# EAGLE board ChestStrapV3Panel (EAGLE 5.07), part 1 of 3
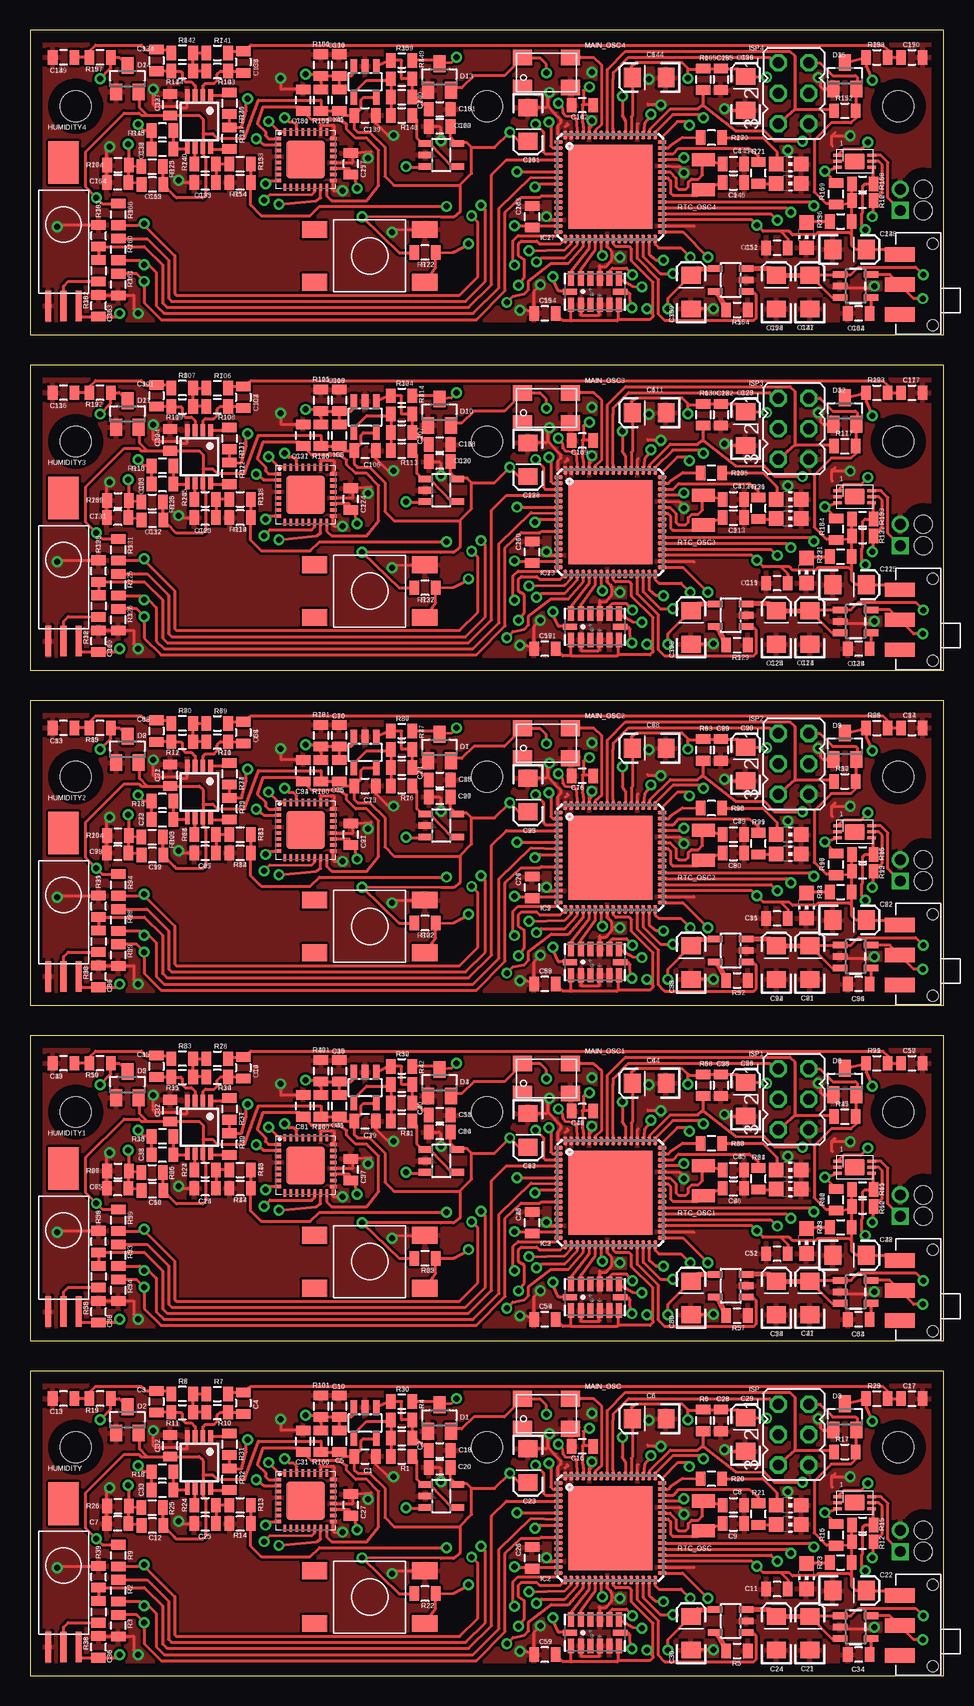
[diagram p0: board, top side]
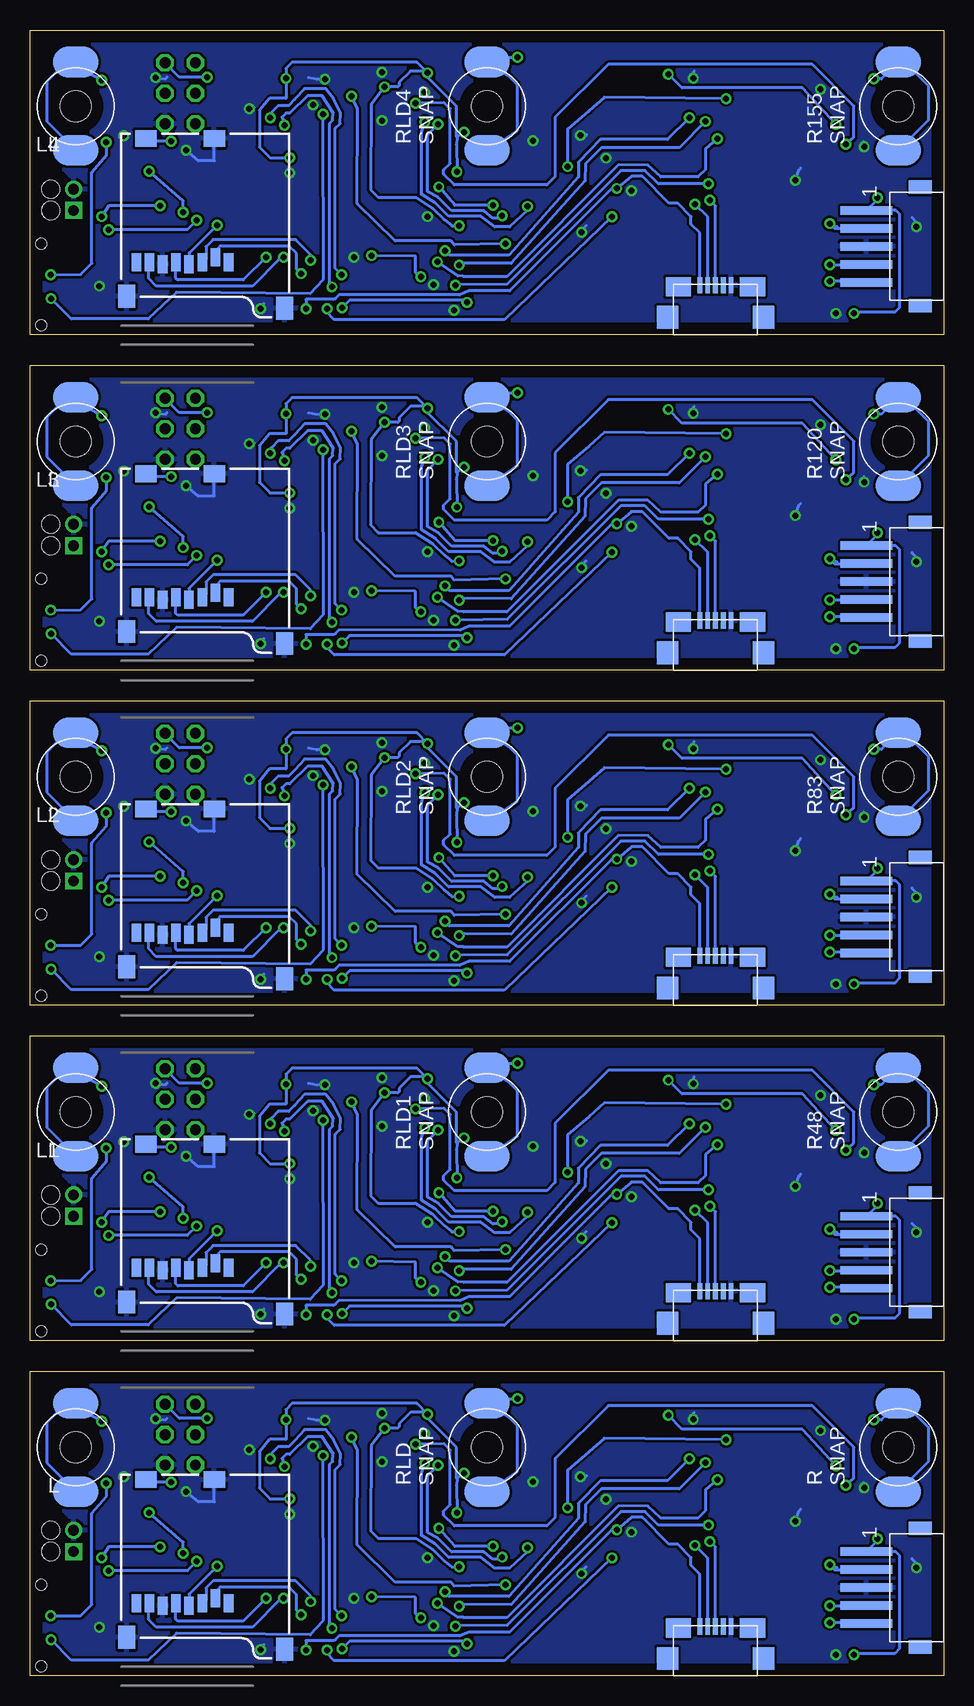
[diagram p1: board, bottom side, seen from below]

Size 76.2 x 137.16 mm. Coordinates in mm from the lower left corner, seen from the top.
Outline: 0,0 76.2,0 76.2,25.4 0,25.4 0,0
Outline: 0,27.94 76.2,27.94 76.2,53.34 0,53.34 0,27.94
Outline: 0,55.88 76.2,55.88 76.2,81.28 0,81.28 0,55.88
Outline: 0,83.82 76.2,83.82 76.2,109.22 0,109.22 0,83.82
Outline: 0,111.76 76.2,111.76 76.2,137.16 0,137.16 0,111.76
Copper layers (1*16): Top 0.035mm / dielectric 1.5mm / Bottom 0.035mm
Design rules "default *": minimum track width 10mil, minimum drill 10mil, track to track 8mil, track to pad 5mil, pad to pad 5mil, via to via 8mil, smd to smd 8mil, copper to edge 40mil, drill to drill 8mil, minimum pad ring 10mil, minimum via ring 8mil, stop-mask expansion 4mil, vias tented up to drill 0mil, thermal gap 10mil

## Footprints (pad centres in the part's own frame; a part is rotated, then mirrored left to right if it is on the bottom)
LGA14 = smd 0.5 x 1.2: 1 2,1.1; 2 1.2,1.1; 3 0.4,1.1; 4 -0.4,1.1; 5 -1.2,1.1; 6 -2,1.1; 8 -2,-1.1; 9 -1.2,-1.1; 10 -0.4,-1.1; 11 0.4,-1.1; 12 1.2,-1.1; 13 2,-1.1 | smd 1.2 x 0.5: 7 -2.1,0; 14 2.1,0
0805 = smd 0.8 x 1.2: 1 -0.9,0; 2 0.9,0
EIA3216 = smd 1.4 x 1.6: A 1.4,0; C -1.4,0
SOT23-5 = smd 0.55 x 1.2: 1 -0.95,-1.3; 2 0,-1.3; 3 0.95,-1.3; 4 0.95,1.3; 5 -0.95,1.3
SOT23 = smd 1 x 1.4: 1 -0.95,-1.1; 2 0.95,-1.1; 3 0,1.1
HIH-5030 = smd 0.508 x 2.54: -V -1.27,-5.334; OUT 0,-5.334; V+ 1.27,-5.334 | smd 2.54 x 3.556: NC 0,6.604
DGK_S-PDSO-G8 = smd 0.4 x 1: 1 -0.975,-2.2; 2 -0.325,-2.2; 3 0.325,-2.2; 4 0.975,-2.2; 5 0.975,2.2; 6 0.325,2.2; 7 -0.325,2.2; 8 -0.975,2.2
MLF64 = smd 0.7 x 0.3: 1 -4.325,3.75; 2 -4.325,3.25; 3 -4.325,2.75; 4 -4.325,2.25; 5 -4.325,1.75; 6 -4.325,1.25; 7 -4.325,0.75; 8 -4.325,0.25; 9 -4.325,-0.25; 10 -4.325,-0.75; 11 -4.325,-1.25; 12 -4.325,-1.75; 13 -4.325,-2.25; 14 -4.325,-2.75; 15 -4.325,-3.25; 16 -4.325,-3.75; 33 4.325,-3.75; 34 4.325,-3.25; 35 4.325,-2.75; 36 4.325,-2.25; 37 4.325,-1.75; 38 4.325,-1.25; 39 4.325,-0.75; 40 4.325,-0.25; 41 4.325,0.25; 42 4.325,0.75; 43 4.325,1.25; 44 4.325,1.75; 45 4.325,2.25; 46 4.325,2.75; 47 4.325,3.25; 48 4.325,3.75 | smd 0.3 x 0.7: 17 -3.75,-4.325; 18 -3.25,-4.325; 19 -2.75,-4.325; 20 -2.25,-4.325; 21 -1.75,-4.325; 22 -1.25,-4.325; 23 -0.75,-4.325; 24 -0.25,-4.325; 25 0.25,-4.325; 26 0.75,-4.325; 27 1.25,-4.325; 28 1.75,-4.325; 29 2.25,-4.325; 30 2.75,-4.325; 31 3.25,-4.325; 32 3.75,-4.325; 49 3.75,4.325; 50 3.25,4.325; 51 2.75,4.325; 52 2.25,4.325; 53 1.75,4.325; 54 1.25,4.325; 55 0.75,4.325; 56 0.25,4.325; 57 -0.25,4.325; 58 -0.75,4.325; 59 -1.25,4.325; 60 -1.75,4.325; 61 -2.25,4.325; 62 -2.75,4.325; 63 -3.25,4.325; 64 -3.75,4.325 | smd 7 x 7: TH 0,0
JP3Q = drill 0.914 octagon: 1 -2.54,-1.27; 2 -2.54,1.27; 3 0,-1.27; 4 0,1.27; 5 2.54,-1.27; 6 2.54,1.27
SNAP = smd 2.54 x 3.81: 1 -3.683,0; 2 3.683,0 | hole 2.54: 0,0
CHIP-LED0805 = smd 1.2 x 1.2: A 0,-1.05; C 0,1.05
4-SMD = smd 1.6 x 1.3: 1 -2,-1.25; 2 2,-1.25; 3 2,1.25; 4 -2,1.25
2-SMD = smd 1.092 x 1.905: P$1 -1.245,0; P$2 1.245,0
MICRO-SD-SOCKET-PP = smd 0.8 x 1.5: 1 -8.94,10.7; 2 -7.84,10.3; 3 -6.74,10.7; 4 -5.64,10.9; 5 -4.54,10.7; 6 -3.44,10.9; 7 -2.34,10.7; 8 -1.24,10.7 | smd 1.8 x 1.4: CD1 -2.05,0.4; CD2 -7.75,0.4 | smd 1.4 x 1.9: GND1 -13.6,14.55; GND3 -0.45,13.55
5-HEADER_JST_SM = smd 0.7 x 4.3: 1 -3,-2.15; 2 -1.5,-2.15; 3 0,-2.15; 4 1.5,-2.15; 5 3,-2.15 | smd 1.1 x 1.9: P$6 4.95,2.35; P$7 -4.95,2.35
6-LEAD_DFN = smd 0.7 x 0.25: 1 -1.425,0.5; 2 -1.425,0; 3 -1.425,-0.5; 4 1.425,-0.5; 5 1.425,0; 6 1.425,0.5 | smd 1.65 x 1.35: HS 0,0
SMDBUTTON = smd 2.1 x 1.4: 1 -1.6,5.2; 2 7.6,5.2; 3 -1.6,0.8; 4 7.6,0.8
2-HEADER_W/SR = drill 0.9 square: 1 0,-0.889 | drill 0.9 round: 2 0,0.889 | hole 1.5: 1.905,0.889; 1.905,-0.889
RA_J7_SM_SWTICH = smd 1.2 x 2.5: 1 -2.5,0; 2 0,0; 3 2.5,0 | hole 0.9: 3.4,-2.75; -3.4,-2.75
MICROB_USB_SM = smd 0.4 x 1.35: 1 -1.3,4.125; 2 -0.65,4.125; 3 0,4.125; 4 0.65,4.125; 5 1.3,4.125 | smd 1.8 x 1.9: P$1 -4,1.45; P$2 4,1.45 | smd 2.1 x 1.6: P$3 -3.1,4; P$4 3.1,4
QFN32 = smd 0.6 x 0.3: 1 -2.3,1.75; 2 -2.3,1.25; 3 -2.3,0.75; 4 -2.3,0.25; 5 -2.3,-0.25; 6 -2.3,-0.75; 7 -2.3,-1.25; 8 -2.3,-1.75; 17 2.3,-1.75; 18 2.3,-1.25; 19 2.3,-0.75; 20 2.3,-0.25; 21 2.3,0.25; 22 2.3,0.75; 23 2.3,1.25; 24 2.3,1.75 | smd 0.3 x 0.6: 9 -1.75,-2.3; 10 -1.25,-2.3; 11 -0.75,-2.3; 12 -0.25,-2.3; 13 0.25,-2.3; 14 0.75,-2.3; 15 1.25,-2.3; 16 1.75,-2.3; 25 1.75,2.3; 26 1.25,2.3; 27 0.75,2.3; 28 0.25,2.3; 29 -0.25,2.3; 30 -0.75,2.3; 31 -1.25,2.3; 32 -1.75,2.3 | smd 3.2 x 3.2: EXP 0,0

## Placement (x,y rotation side)
ACCEL  ADXL345  [LGA14]  47.12,3.61 180 top
ACCEL1  ADXL345  [LGA14]  47.12,31.55 180 top
ACCEL2  ADXL345  [LGA14]  47.12,59.49 180 top
ACCEL3  ADXL345  [LGA14]  47.12,87.43 180 top
ACCEL4  ADXL345  [LGA14]  47.12,115.37 180 top
C1  0.1uF  [0805]  27.94,18.29 0 top
C2  1uF  [0805]  30.99,19.81 0 top
C3  1uF  [0805]  10.54,22.86 270 top
C4  1uF  [0805]  17.78,22.73 270 top
C5  0.1uF  [0805]  25.78,19.56 90 top
C6  10uF  [EIA3216]  51.64,21.44 180 top
C7  0.1uF  [0805]  7.32,12.7 180 top
C8  15pF  [0805]  58.65,14.22 0 top
C9  15pF  [0805]  58.65,12.7 0 top
C10  0.1uF  [0805]  25.78,22.48 90 top
C11  0.1uF  [0805]  62.28,7.24 180 top
C12  0.1uF  [0805]  10.21,12.52 180 top
C13  47pF  [0805]  2.79,23.11 180 top
C14  0.1uF  [0805]  14.61,40.64 180 top
C15  1uF  [0805]  10.54,50.8 270 top
C16  0.1uF  [0805]  46.05,19.13 180 top
C17  47pF  [0805]  73.53,23.11 0 top
C18  47pF  [0805]  34.16,18.8 0 top
C19  1uF  [0805]  17.78,50.67 270 top
C20  0.1uF  [0805]  34.16,17.37 180 top
C21  10uF  [EIA3216]  65.02,3.56 90 top
C22  2.2uF  [EIA3216]  68.33,7.11 0 top
C23  4.7uF  [EIA3216]  41.53,17.53 270 top
C24  4.7uF  [EIA3216]  62.23,3.56 90 top
C25  0.1uF  [0805]  14.61,12.7 180 top
C26  0.1uF  [0805]  41.86,9.83 90 top
C27  10,000pF  [0805]  26.75,14.25 90 top
C28  0.1uF  [0805]  57.61,21.29 270 top
C29  4.7uF  [EIA3216]  59.66,20.12 90 top
C30  4.7uF  [EIA3216]  55.12,3.56 90 top
C31  0.1uF  [0805]  22.78,19.56 90 top
C32  0.1uF  [0805]  11.68,19.18 90 top
C33  100pF  [0805]  11.05,15.49 180 top
C34  470pF  [0805]  69.09,1.78 180 top
C35  0.1uF  [0805]  25.78,50.42 90 top
C36  0.1uF  [0805]  5.71,2.41 90 top
C37  0.1uF  [0805]  11.68,47.12 90 top
C38  100pF  [0805]  11.05,43.43 180 top
C39  0.1uF  [0805]  27.94,46.23 0 top
C40  1uF  [0805]  30.99,47.75 0 top
C41  0.1uF  [0805]  25.78,47.5 90 top
C42  0.1uF  [0805]  46.05,47.07 180 top
C43  0.1uF  [0805]  41.86,37.77 90 top
C44  10uF  [EIA3216]  51.64,49.38 180 top
C45  15pF  [0805]  58.65,42.16 0 top
C46  15pF  [0805]  58.65,40.64 0 top
C47  10uF  [EIA3216]  65.02,31.5 90 top
C48  2.2uF  [EIA3216]  68.33,35.05 0 top
C49  47pF  [0805]  2.79,51.05 180 top
C50  47pF  [0805]  73.53,51.05 0 top
C51  47pF  [0805]  34.16,46.74 0 top
C52  0.1uF  [0805]  62.28,35.18 180 top
C53  0.1uF  [0805]  5.71,30.35 90 top
C54  0.1uF  [0805]  42.93,29.72 180 top
C55  0.1uF  [0805]  57.61,49.23 270 top
C56  4.7uF  [EIA3216]  59.66,48.06 90 top
C57  10,000pF  [0805]  26.75,42.19 90 top
C58  4.7uF  [EIA3216]  62.23,31.5 90 top
C59  0.1uF  [0805]  42.93,1.78 180 top
C60  4.7uF  [EIA3216]  55.12,31.5 90 top
C61  0.1uF  [0805]  22.78,47.5 90 top
C62  4.7uF  [EIA3216]  41.53,45.47 270 top
C63  470pF  [0805]  69.09,29.72 180 top
C64  0.1uF  [0805]  34.16,45.31 180 top
C65  0.1uF  [0805]  7.32,40.64 180 top
C66  0.1uF  [0805]  10.21,40.46 180 top
C67  0.1uF  [0805]  14.61,68.58 180 top
C68  1uF  [0805]  10.54,78.74 270 top
C69  1uF  [0805]  17.78,78.61 270 top
C70  0.1uF  [0805]  25.78,78.36 90 top
C71  0.1uF  [0805]  11.68,75.06 90 top
C72  100pF  [0805]  11.05,71.37 180 top
C73  0.1uF  [0805]  27.94,74.17 0 top
C74  1uF  [0805]  30.99,75.69 0 top
C75  0.1uF  [0805]  25.78,75.44 90 top
C76  0.1uF  [0805]  46.05,75.01 180 top
C77  0.1uF  [0805]  41.86,65.71 90 top
C78  10uF  [EIA3216]  51.64,77.32 180 top
C79  15pF  [0805]  58.65,70.1 0 top
C80  15pF  [0805]  58.65,68.58 0 top
C81  10uF  [EIA3216]  65.02,59.44 90 top
C82  2.2uF  [EIA3216]  68.33,62.99 0 top
C83  47pF  [0805]  2.79,78.99 180 top
C84  47pF  [0805]  73.53,78.99 0 top
C85  47pF  [0805]  34.16,74.68 0 top
C86  0.1uF  [0805]  62.28,63.12 180 top
C87  0.1uF  [0805]  5.71,58.29 90 top
C88  0.1uF  [0805]  42.93,57.66 180 top
C89  0.1uF  [0805]  57.61,77.17 270 top
C90  4.7uF  [EIA3216]  59.66,76 90 top
C91  10,000pF  [0805]  26.75,70.13 90 top
C92  4.7uF  [EIA3216]  62.23,59.44 90 top
C93  4.7uF  [EIA3216]  55.12,59.44 90 top
C94  0.1uF  [0805]  22.78,75.44 90 top
C95  4.7uF  [EIA3216]  41.53,73.41 270 top
C96  470pF  [0805]  69.09,57.66 180 top
C97  0.1uF  [0805]  34.16,73.25 180 top
C98  0.1uF  [0805]  7.32,68.58 180 top
C99  0.1uF  [0805]  10.21,68.4 180 top
C100  0.1uF  [0805]  14.61,96.52 180 top
C101  1uF  [0805]  10.54,106.68 270 top
C102  1uF  [0805]  17.78,106.55 270 top
C103  0.1uF  [0805]  25.78,106.3 90 top
C104  0.1uF  [0805]  11.68,103 90 top
C105  100pF  [0805]  11.05,99.31 180 top
C106  0.1uF  [0805]  27.94,102.11 0 top
C107  1uF  [0805]  30.99,103.63 0 top
C108  0.1uF  [0805]  25.78,103.38 90 top
C109  0.1uF  [0805]  46.05,102.95 180 top
C110  0.1uF  [0805]  41.86,93.65 90 top
C111  10uF  [EIA3216]  51.64,105.26 180 top
C112  15pF  [0805]  58.65,98.04 0 top
C113  15pF  [0805]  58.65,96.52 0 top
C114  10uF  [EIA3216]  65.02,87.38 90 top
C115  2.2uF  [EIA3216]  68.33,90.93 0 top
C116  47pF  [0805]  2.79,106.93 180 top
C117  47pF  [0805]  73.53,106.93 0 top
C118  47pF  [0805]  34.16,102.62 0 top
C119  0.1uF  [0805]  62.28,91.06 180 top
C120  0.1uF  [0805]  5.71,86.23 90 top
C121  0.1uF  [0805]  42.93,85.6 180 top
C122  0.1uF  [0805]  57.61,105.11 270 top
C123  4.7uF  [EIA3216]  59.66,103.94 90 top
C124  10,000pF  [0805]  26.75,98.07 90 top
C125  4.7uF  [EIA3216]  62.23,87.38 90 top
C126  4.7uF  [EIA3216]  55.12,87.38 90 top
C127  0.1uF  [0805]  22.78,103.38 90 top
C128  4.7uF  [EIA3216]  41.53,101.35 270 top
C129  470pF  [0805]  69.09,85.6 180 top
C130  0.1uF  [0805]  34.16,101.19 180 top
C131  0.1uF  [0805]  7.32,96.52 180 top
C132  0.1uF  [0805]  10.21,96.34 180 top
C133  0.1uF  [0805]  14.61,124.46 180 top
C134  1uF  [0805]  10.54,134.62 270 top
C135  1uF  [0805]  17.78,134.49 270 top
C136  0.1uF  [0805]  25.78,134.24 90 top
C137  0.1uF  [0805]  11.68,130.94 90 top
C138  100pF  [0805]  11.05,127.25 180 top
C139  0.1uF  [0805]  27.94,130.05 0 top
C140  1uF  [0805]  30.99,131.57 0 top
C141  0.1uF  [0805]  25.78,131.32 90 top
C142  0.1uF  [0805]  46.05,130.89 180 top
C143  0.1uF  [0805]  41.86,121.59 90 top
C144  10uF  [EIA3216]  51.64,133.2 180 top
C145  15pF  [0805]  58.65,125.98 0 top
C146  15pF  [0805]  58.65,124.46 0 top
C147  10uF  [EIA3216]  65.02,115.32 90 top
C148  2.2uF  [EIA3216]  68.33,118.87 0 top
C149  47pF  [0805]  2.79,134.87 180 top
C150  47pF  [0805]  73.53,134.87 0 top
C151  47pF  [0805]  34.16,130.56 0 top
C152  0.1uF  [0805]  62.28,119 180 top
C153  0.1uF  [0805]  5.71,114.17 90 top
C154  0.1uF  [0805]  42.93,113.54 180 top
C155  0.1uF  [0805]  57.61,133.05 270 top
C156  4.7uF  [EIA3216]  59.66,131.88 90 top
C157  10,000pF  [0805]  26.75,126.01 90 top
C158  4.7uF  [EIA3216]  62.23,115.32 90 top
C159  4.7uF  [EIA3216]  55.12,115.32 90 top
C160  0.1uF  [0805]  22.78,131.32 90 top
C161  4.7uF  [EIA3216]  41.53,129.29 270 top
C162  470pF  [0805]  69.09,113.54 180 top
C163  0.1uF  [0805]  34.16,129.13 180 top
C164  0.1uF  [0805]  7.32,124.46 180 top
C165  0.1uF  [0805]  10.21,124.28 180 top
CHARGER/MCP1  MCP73831  [SOT23-5]  58.42,32.51 90 top
CHARGER/MCP2  MCP73831  [SOT23-5]  58.42,60.45 90 top
CHARGER/MCP3  MCP73831  [SOT23-5]  58.42,88.39 90 top
CHARGER/MCP4  MCP73831  [SOT23-5]  58.42,116.33 90 top
CHARGER/MCP7383  MCP73831  [SOT23-5]  58.42,4.57 90 top
D1  BAS40-04  [SOT23]  34.14,21.49 0 top
D2  BAS40-04  [SOT23]  8.13,21.34 0 top
D3  BAS40-04  [SOT23]  67.94,21.59 0 top
D4  BAS40-04  [SOT23]  34.14,49.43 0 top
D5  BAS40-04  [SOT23]  8.13,49.28 0 top
D6  BAS40-04  [SOT23]  67.94,49.53 0 top
D7  BAS40-04  [SOT23]  34.14,77.37 0 top
D8  BAS40-04  [SOT23]  8.13,77.22 0 top
D9  BAS40-04  [SOT23]  67.94,77.47 0 top
D10  BAS40-04  [SOT23]  34.14,105.31 0 top
D11  BAS40-04  [SOT23]  8.13,105.16 0 top
D12  BAS40-04  [SOT23]  67.94,105.41 0 top
D13  BAS40-04  [SOT23]  34.14,133.25 0 top
D14  BAS40-04  [SOT23]  8.13,133.1 0 top
D15  BAS40-04  [SOT23]  67.94,133.35 0 top
HUMIDITY  HIH-5030  [HIH-5030]  2.79,7.75 0 top
HUMIDITY1  HIH-5030  [HIH-5030]  2.79,35.69 0 top
HUMIDITY2  HIH-5030  [HIH-5030]  2.79,63.63 0 top
HUMIDITY3  HIH-5030  [HIH-5030]  2.79,91.57 0 top
HUMIDITY4  HIH-5030  [HIH-5030]  2.79,119.51 0 top
IC1  INA326  [DGK_S-PDSO-G8]  14.1,45.72 180 top
IC2  XMEGA_256_A3B  [MLF64]  48.39,12.32 0 top
IC3  XMEGA_256_A3B  [MLF64]  48.39,40.26 0 top
IC4  OPA333  [SOT23-5]  34.29,14.99 270 top
IC5  OPA333  [SOT23-5]  27.94,21.08 180 top
IC6  OPA333  [SOT23-5]  34.29,42.93 270 top
IC7  OPA333  [SOT23-5]  27.94,49.02 180 top
IC8  INA326  [DGK_S-PDSO-G8]  14.1,73.66 180 top
IC9  XMEGA_256_A3B  [MLF64]  48.39,68.2 0 top
IC10  OPA333  [SOT23-5]  34.29,70.87 270 top
IC11  OPA333  [SOT23-5]  27.94,76.96 180 top
IC12  INA326  [DGK_S-PDSO-G8]  14.1,101.6 180 top
IC13  XMEGA_256_A3B  [MLF64]  48.39,96.14 0 top
IC14  OPA333  [SOT23-5]  34.29,98.81 270 top
IC15  OPA333  [SOT23-5]  27.94,104.9 180 top
IC16  INA326  [DGK_S-PDSO-G8]  14.1,129.54 180 top
IC17  XMEGA_256_A3B  [MLF64]  48.39,124.08 0 top
IC18  OPA333  [SOT23-5]  34.29,126.75 270 top
IC19  OPA333  [SOT23-5]  27.94,132.84 180 top
IC25  INA326  [DGK_S-PDSO-G8]  14.1,17.78 180 top
ISP  [JP3Q]  63.68,20.12 270 top
ISP1  [JP3Q]  63.68,48.06 270 top
ISP2  [JP3Q]  63.68,76 270 top
ISP3  [JP3Q]  63.68,103.94 270 top
ISP4  [JP3Q]  63.68,131.88 270 top
L  SNAP  [SNAP]  72.39,19.05 90 bottom
L1  SNAP  [SNAP]  72.39,46.99 90 bottom
L2  SNAP  [SNAP]  72.39,74.93 90 bottom
L3  SNAP  [SNAP]  72.39,102.87 90 bottom
L4  SNAP  [SNAP]  72.39,130.81 90 bottom
LED1  Green  [CHIP-LED0805]  63.25,14.22 270 top
LED2  PWR  [CHIP-LED0805]  64.74,8.31 180 top
LED3  Red  [CHIP-LED0805]  63.25,12.62 270 top
LED4  PWR  [CHIP-LED0805]  64.74,36.25 180 top
LED5  Green  [CHIP-LED0805]  63.25,42.16 270 top
LED6  Red  [CHIP-LED0805]  63.25,40.56 270 top
LED7  PWR  [CHIP-LED0805]  64.74,64.19 180 top
LED8  Green  [CHIP-LED0805]  63.25,70.1 270 top
LED9  Red  [CHIP-LED0805]  63.25,68.5 270 top
LED10  PWR  [CHIP-LED0805]  64.74,92.13 180 top
LED11  Green  [CHIP-LED0805]  63.25,98.04 270 top
LED12  Red  [CHIP-LED0805]  63.25,96.44 270 top
LED13  PWR  [CHIP-LED0805]  64.74,120.07 180 top
LED14  Green  [CHIP-LED0805]  63.25,125.98 270 top
LED15  Red  [CHIP-LED0805]  63.25,124.38 270 top
MAIN_OSC  14.7456MHZ  [4-SMD]  43.05,21.84 0 top
MAIN_OSC1  14.7456MHZ  [4-SMD]  43.05,49.78 0 top
MAIN_OSC2  14.7456MHZ  [4-SMD]  43.05,77.72 0 top
MAIN_OSC3  14.7456MHZ  [4-SMD]  43.05,105.66 0 top
MAIN_OSC4  14.7456MHZ  [4-SMD]  43.05,133.6 0 top
R  SNAP  [SNAP]  3.81,19.05 90 bottom
R1  22k  [0805]  30.99,18.29 0 top
R2  100k  [0805]  7.37,7.11 90 top
R3  100k  [0805]  7.37,4.19 90 top
R4  430k  [0805]  30.99,21.34 0 top
R5  2k  [0805]  58.95,2.08 0 top
R6  10k  [0805]  56.13,21.29 270 top
R7  1M  [0805]  15.62,23.5 0 top
R8  1M  [0805]  12.7,23.5 180 top
R9  10k (0.5%)  [0805]  7.37,10.03 90 top
R10  1M  [0805]  15.62,21.97 180 top
R11  1M  [0805]  12.7,21.97 0 top
R12  2k  [0805]  69.43,11.18 0 top
R13  12k (0.5%)  [0805]  17.53,14.22 0 top
R14  20k (0.5%)  [0805]  17.53,12.7 180 top
R15  2k  [0805]  69.43,12.58 0 top
R16  2k  [0805]  67.2,11.74 90 top
R17  10k  [0805]  67.94,18.67 0 top
R18  1M  [0805]  11.05,17.02 180 top
R19  22k  [0805]  5.84,23.11 180 top
R20  422  [0805]  56.82,16.43 180 top
R21  422  [0805]  60.73,13.49 90 top
R22  10k  [0805]  32.94,6.86 180 top
R23  422  [0805]  67.59,9.45 0 top
R24  100  [0805]  14.61,14.22 0 top
R25  12k (0.5%)  [0805]  10.19,14.02 0 top
R26  20k (0.5%)  [0805]  7.34,14.15 0 top
R27  100  [0805]  14.61,42.16 0 top
R28  1M  [0805]  15.62,51.44 0 top
R29  22k  [0805]  70.61,23.11 0 top
R30  22k  [0805]  30.99,22.86 0 top
R31  1k (0.1%)  [0805]  16.64,19.3 270 top
R32  1k (0.1%)  [0805]  16.64,16.38 90 top
R33  1M  [0805]  12.7,51.44 180 top
R34  1M  [0805]  15.62,49.91 180 top
R35  1M  [0805]  12.7,49.91 0 top
R36  1M  [0805]  11.05,44.96 180 top
R37  1k (0.1%)  [0805]  16.64,47.24 270 top
R38  32.4k (0.5%)  [0805]  5.71,5.33 270 top
R39  32.4k (0.5%)  [0805]  5.71,8.26 90 top
R40  1k (0.1%)  [0805]  16.64,44.32 90 top
R41  22k  [0805]  30.99,46.23 0 top
R42  430k  [0805]  30.99,49.28 0 top
R43  10k (0.5%)  [0805]  24.26,50.42 270 top
R44  10k (0.5%)  [0805]  24.26,47.5 270 top
R45  10k  [0805]  67.94,46.61 0 top
R46  12k (0.5%)  [0805]  17.53,42.16 0 top
R47  20k (0.5%)  [0805]  17.53,40.64 180 top
R48  SNAP  [SNAP]  3.81,46.99 90 bottom
R49  422  [0805]  67.59,37.39 0 top
R50  22k  [0805]  5.84,51.05 180 top
R51  22k  [0805]  70.61,51.05 0 top
R52  22k  [0805]  30.99,50.8 0 top
R53  100k  [0805]  7.37,35.05 90 top
R54  100k  [0805]  7.37,32.13 90 top
R55  32.4k (0.5%)  [0805]  5.71,33.27 270 top
R56  32.4k (0.5%)  [0805]  5.71,36.2 90 top
R57  2k  [0805]  58.95,30.02 0 top
R58  10k  [0805]  56.13,49.23 270 top
R59  10k (0.5%)  [0805]  7.37,37.97 90 top
R60  2k  [0805]  69.43,39.12 0 top
R61  2k  [0805]  69.43,40.52 0 top
R62  2k  [0805]  67.2,39.68 90 top
R63  422  [0805]  56.82,44.37 180 top
R64  422  [0805]  60.73,41.43 90 top
R65  10k  [0805]  32.94,34.8 180 top
R66  12k (0.5%)  [0805]  10.19,41.96 0 top
R67  20k (0.5%)  [0805]  7.34,42.09 0 top
R68  100  [0805]  14.61,70.1 0 top
R69  1M  [0805]  15.62,79.38 0 top
R70  1M  [0805]  12.7,79.38 180 top
R71  1M  [0805]  15.62,77.85 180 top
R72  1M  [0805]  12.7,77.85 0 top
R73  1M  [0805]  11.05,72.9 180 top
R74  1k (0.1%)  [0805]  16.64,75.18 270 top
R75  1k (0.1%)  [0805]  16.64,72.26 90 top
R76  22k  [0805]  30.99,74.17 0 top
R77  430k  [0805]  30.99,77.22 0 top
R78  10k (0.5%)  [0805]  24.26,78.36 270 top
R79  10k (0.5%)  [0805]  24.26,75.44 270 top
R80  10k  [0805]  67.94,74.55 0 top
R81  12k (0.5%)  [0805]  17.53,70.1 0 top
R82  20k (0.5%)  [0805]  17.53,68.58 180 top
R83  SNAP  [SNAP]  3.81,74.93 90 bottom
R84  422  [0805]  67.59,65.33 0 top
R85  22k  [0805]  5.84,78.99 180 top
R86  22k  [0805]  70.61,78.99 0 top
R87  22k  [0805]  30.99,78.74 0 top
R88  100k  [0805]  7.37,62.99 90 top
R89  100k  [0805]  7.37,60.07 90 top
R90  32.4k (0.5%)  [0805]  5.71,61.21 270 top
R91  32.4k (0.5%)  [0805]  5.71,64.14 90 top
R92  2k  [0805]  58.95,57.96 0 top
R93  10k  [0805]  56.13,77.17 270 top
R94  10k (0.5%)  [0805]  7.37,65.91 90 top
R95  2k  [0805]  69.43,67.06 0 top
R96  2k  [0805]  69.43,68.46 0 top
R97  2k  [0805]  67.2,67.62 90 top
R98  422  [0805]  56.82,72.31 180 top
R99  422  [0805]  60.73,69.37 90 top
R100  10k (0.5%)  [0805]  24.26,19.56 270 top
R101  10k (0.5%)  [0805]  24.26,22.48 270 top
R102  10k  [0805]  32.94,62.74 180 top
R103  12k (0.5%)  [0805]  10.19,69.9 0 top
R104  20k (0.5%)  [0805]  7.34,70.03 0 top
R105  100  [0805]  14.61,98.04 0 top
R106  1M  [0805]  15.62,107.31 0 top
R107  1M  [0805]  12.7,107.31 180 top
R108  1M  [0805]  15.62,105.79 180 top
R109  1M  [0805]  12.7,105.79 0 top
R110  1M  [0805]  11.05,100.84 180 top
R111  1k (0.1%)  [0805]  16.64,103.12 270 top
R112  1k (0.1%)  [0805]  16.64,100.2 90 top
R113  22k  [0805]  30.99,102.11 0 top
R114  430k  [0805]  30.99,105.16 0 top
R115  10k (0.5%)  [0805]  24.26,106.3 270 top
R116  10k (0.5%)  [0805]  24.26,103.38 270 top
R117  10k  [0805]  67.94,102.49 0 top
R118  12k (0.5%)  [0805]  17.53,98.04 0 top
R119  20k (0.5%)  [0805]  17.53,96.52 180 top
R120  SNAP  [SNAP]  3.81,102.87 90 bottom
R121  422  [0805]  67.59,93.27 0 top
R122  22k  [0805]  5.84,106.93 180 top
R123  22k  [0805]  70.61,106.93 0 top
R124  22k  [0805]  30.99,106.68 0 top
R125  100k  [0805]  7.37,90.93 90 top
R126  100k  [0805]  7.37,88.01 90 top
R127  32.4k (0.5%)  [0805]  5.71,89.15 270 top
R128  32.4k (0.5%)  [0805]  5.71,92.08 90 top
R129  2k  [0805]  58.95,85.9 0 top
R130  10k  [0805]  56.13,105.11 270 top
R131  10k (0.5%)  [0805]  7.37,93.85 90 top
R132  2k  [0805]  69.43,95 0 top
R133  2k  [0805]  69.43,96.4 0 top
R134  2k  [0805]  67.2,95.56 90 top
R135  422  [0805]  56.82,100.25 180 top
R136  422  [0805]  60.73,97.31 90 top
R137  10k  [0805]  32.94,90.68 180 top
R138  12k (0.5%)  [0805]  10.19,97.84 0 top
R139  20k (0.5%)  [0805]  7.34,97.97 0 top
R140  100  [0805]  14.61,125.98 0 top
R141  1M  [0805]  15.62,135.25 0 top
R142  1M  [0805]  12.7,135.25 180 top
R143  1M  [0805]  15.62,133.73 180 top
R144  1M  [0805]  12.7,133.73 0 top
R145  1M  [0805]  11.05,128.78 180 top
R146  1k (0.1%)  [0805]  16.64,131.06 270 top
R147  1k (0.1%)  [0805]  16.64,128.14 90 top
R148  22k  [0805]  30.99,130.05 0 top
R149  430k  [0805]  30.99,133.1 0 top
R150  10k (0.5%)  [0805]  24.26,134.24 270 top
R151  10k (0.5%)  [0805]  24.26,131.32 270 top
R152  10k  [0805]  67.94,130.43 0 top
R153  12k (0.5%)  [0805]  17.53,125.98 0 top
R154  20k (0.5%)  [0805]  17.53,124.46 180 top
R155  SNAP  [SNAP]  3.81,130.81 90 bottom
R156  422  [0805]  67.59,121.21 0 top
R157  22k  [0805]  5.84,134.87 180 top
R158  22k  [0805]  70.61,134.87 0 top
R159  22k  [0805]  30.99,134.62 0 top
R160  100k  [0805]  7.37,118.87 90 top
R161  100k  [0805]  7.37,115.95 90 top
R162  32.4k (0.5%)  [0805]  5.71,117.09 270 top
R163  32.4k (0.5%)  [0805]  5.71,120.02 90 top
R164  2k  [0805]  58.95,113.84 0 top
R165  10k  [0805]  56.13,133.05 270 top
R166  10k (0.5%)  [0805]  7.37,121.79 90 top
R167  2k  [0805]  69.43,122.94 0 top
R168  2k  [0805]  69.43,124.34 0 top
R169  2k  [0805]  67.2,123.5 90 top
R170  422  [0805]  56.82,128.19 180 top
R171  422  [0805]  60.73,125.25 90 top
R172  10k  [0805]  32.94,118.62 180 top
R173  12k (0.5%)  [0805]  10.19,125.78 0 top
R174  20k (0.5%)  [0805]  7.34,125.91 0 top
RLD  SNAP  [SNAP]  38.1,19.05 90 bottom
RLD1  SNAP  [SNAP]  38.1,46.99 90 bottom
RLD2  SNAP  [SNAP]  38.1,74.93 90 bottom
RLD3  SNAP  [SNAP]  38.1,102.87 90 bottom
RLD4  SNAP  [SNAP]  38.1,130.81 90 bottom
RTC_OSC  32.768khz  [2-SMD]  56.16,13.34 270 top
RTC_OSC1  32.768khz  [2-SMD]  56.16,41.27 270 top
RTC_OSC2  32.768khz  [2-SMD]  56.16,69.22 270 top
RTC_OSC3  32.768khz  [2-SMD]  56.16,97.16 270 top
RTC_OSC4  32.768khz  [2-SMD]  56.16,125.09 270 top
SD  USD-SOCKETNEW  [MICRO-SD-SOCKET-PP]  68.58,16.76 180 bottom
SD1  USD-SOCKETNEW  [MICRO-SD-SOCKET-PP]  68.58,44.7 180 bottom
SD2  USD-SOCKETNEW  [MICRO-SD-SOCKET-PP]  68.58,72.64 180 bottom
SD3  USD-SOCKETNEW  [MICRO-SD-SOCKET-PP]  68.58,100.58 180 bottom
SD4  USD-SOCKETNEW  [MICRO-SD-SOCKET-PP]  68.58,128.52 180 bottom
U$1  5-HEADER_JST_SM  [5-HEADER_JST_SM]  4.32,7.37 270 bottom
U$2  LTC2941  [6-LEAD_DFN]  68.75,14.45 0 top
U$3  BUTTON  [SMDBUTTON]  31.32,9.58 180 top
U$4  2_HEADER_W/SR  [2-HEADER_W/SR]  72.57,11.25 0 top
U$5  SWITCH  [RA_J7_SM_SWTICH]  72.52,4.19 90 top
U$6  MICROB_SM  [MICROB_USB_SM]  19.05,0 0 bottom
U$7  SWITCH  [RA_J7_SM_SWTICH]  72.52,32.13 90 top
U$8  5-HEADER_JST_SM  [5-HEADER_JST_SM]  4.32,35.31 270 bottom
U$9  LTC2941  [6-LEAD_DFN]  68.75,42.39 0 top
U$10  BUTTON  [SMDBUTTON]  31.32,37.52 180 top
U$11  2_HEADER_W/SR  [2-HEADER_W/SR]  72.57,39.19 0 top
U$12  MICROB_SM  [MICROB_USB_SM]  19.05,27.94 0 bottom
U$13  SWITCH  [RA_J7_SM_SWTICH]  72.52,60.07 90 top
U$14  5-HEADER_JST_SM  [5-HEADER_JST_SM]  4.32,63.25 270 bottom
U$15  LTC2941  [6-LEAD_DFN]  68.75,70.33 0 top
U$16  BUTTON  [SMDBUTTON]  31.32,65.46 180 top
U$17  2_HEADER_W/SR  [2-HEADER_W/SR]  72.57,67.13 0 top
U$18  MICROB_SM  [MICROB_USB_SM]  19.05,55.88 0 bottom
U$19  SWITCH  [RA_J7_SM_SWTICH]  72.52,88.01 90 top
U$20  5-HEADER_JST_SM  [5-HEADER_JST_SM]  4.32,91.19 270 bottom
U$21  LTC2941  [6-LEAD_DFN]  68.75,98.27 0 top
U$22  BUTTON  [SMDBUTTON]  31.32,93.4 180 top
U$23  2_HEADER_W/SR  [2-HEADER_W/SR]  72.57,95.07 0 top
U$24  MICROB_SM  [MICROB_USB_SM]  19.05,83.82 0 bottom
U$25  SWITCH  [RA_J7_SM_SWTICH]  72.52,115.95 90 top
U$26  5-HEADER_JST_SM  [5-HEADER_JST_SM]  4.32,119.13 270 bottom
U$27  LTC2941  [6-LEAD_DFN]  68.75,126.21 0 top
U$28  BUTTON  [SMDBUTTON]  31.32,121.34 180 top
U$29  2_HEADER_W/SR  [2-HEADER_W/SR]  72.57,123.01 0 top
U$30  MICROB_SM  [MICROB_USB_SM]  19.05,111.76 0 bottom
USB_CHIP  FT232RQ  [QFN32]  22.99,14.61 0 top
USB_CHIP1  FT232RQ  [QFN32]  22.99,42.55 0 top
USB_CHIP2  FT232RQ  [QFN32]  22.99,70.48 0 top
USB_CHIP3  FT232RQ  [QFN32]  22.99,98.42 0 top
USB_CHIP4  FT232RQ  [QFN32]  22.99,126.36 0 top
VREG  MIC5205  [SOT23-5]  68.83,4.06 270 top
VREG1  MIC5205  [SOT23-5]  68.83,32 270 top
VREG2  MIC5205  [SOT23-5]  68.83,59.94 270 top
VREG3  MIC5205  [SOT23-5]  68.83,87.88 270 top
VREG4  MIC5205  [SOT23-5]  68.83,115.82 270 top

## Library data of the parts
ACCEL ACCEL1-ACCEL4 C1-C165 R1-R47 R49-R82 R84-R119 R121-R154 R156-R174 SD SD1-SD4 VREG VREG1-VREG4 = SparkFun
CHARGER/MCP1-CHARGER/MCP4 CHARGER/MCP7383 U$3 U$5 U$7 U$10 U$13 U$16 U$19 U$22 U$25 U$28 = GadgetOne
D1-D15 = diode
HUMIDITY HUMIDITY1-HUMIDITY4 L L1-L4 MAIN_OSC MAIN_OSC1-MAIN_OSC4 R R48 R83 R120 R155 RLD RLD1-RLD4 RTC_OSC RTC_OSC1-RTC_OSC4 U$1 U$2 U$4 U$6 U$8 U$9 U$11 U$12 U$14 U$15 U$17 U$18 U$20 U$21 U$23 U$24 U$26 U$27 U$29 U$30 = Josh
IC1 IC8 IC12 IC16 IC25 = mpocius
IC2 IC3 IC9 IC13 IC17 = xmega
IC4-IC7 IC10 IC11 IC14 IC15 IC18 IC19 = analog-devices
ISP ISP1-ISP4 = jumper
LED1-LED15 = led
USB_CHIP USB_CHIP1-USB_CHIP4 = ftdichip

## Nets
ACC_CLK: ACCEL.14 IC2.23
ACC_CLK1: ACCEL1.14 IC3.23
ACC_CLK2: ACCEL2.14 IC9.23
ACC_CLK3: ACCEL3.14 IC13.23
ACC_CLK4: ACCEL4.14 IC17.23
ACC_CS: ACCEL.7 IC2.20
ACC_CS1: ACCEL1.7 IC3.20
ACC_CS2: ACCEL2.7 IC9.20
ACC_CS3: ACCEL3.7 IC13.20
ACC_CS4: ACCEL4.7 IC17.20
ACC_INT1: ACCEL.8 IC2.48
ACC_INT2: ACCEL.9 IC2.49
ACC_INT3: ACCEL1.8 IC3.48
ACC_INT4: ACCEL1.9 IC3.49
ACC_INT5: ACCEL2.8 IC9.48
ACC_INT6: ACCEL2.9 IC9.49
ACC_INT7: ACCEL3.8 IC13.48
ACC_INT8: ACCEL3.9 IC13.49
ACC_INT9: ACCEL4.8 IC17.48
ACC_INT10: ACCEL4.9 IC17.49
ACC_MISO: ACCEL.12 IC2.22
ACC_MISO1: ACCEL1.12 IC3.22
ACC_MISO2: ACCEL2.12 IC9.22
ACC_MISO3: ACCEL3.12 IC13.22
ACC_MISO4: ACCEL4.12 IC17.22
ACC_MOSI: ACCEL.13 IC2.21
ACC_MOSI1: ACCEL1.13 IC3.21
ACC_MOSI2: ACCEL2.13 IC9.21
ACC_MOSI3: ACCEL3.13 IC13.21
ACC_MOSI4: ACCEL4.13 IC17.21
BUTTON: IC2.54 R22.1 U$3.1
BUTTON1: IC3.54 R65.1 U$10.1
BUTTON2: IC9.54 R102.1 U$16.1
BUTTON3: IC13.54 R137.1 U$22.1
BUTTON4: IC17.54 R172.1 U$28.1
CHARGE: CHARGER/MCP7383.1 IC2.29
CHARGE1: CHARGER/MCP1.1 IC3.29
CHARGE2: CHARGER/MCP2.1 IC9.29
CHARGE3: CHARGER/MCP3.1 IC13.29
CHARGE4: CHARGER/MCP4.1 IC17.29
D+: U$6.3 USB_CHIP.14
D+1: U$12.3 USB_CHIP1.14
D+2: U$18.3 USB_CHIP2.14
D+3: U$24.3 USB_CHIP3.14
D+4: U$30.3 USB_CHIP4.14
D-: U$6.2 USB_CHIP.15
D-1: U$12.2 USB_CHIP1.15
D-2: U$18.2 USB_CHIP2.15
D-3: U$24.2 USB_CHIP3.15
D-4: U$30.2 USB_CHIP4.15
DEBUG_CTS: IC2.16 USB_CHIP.32
DEBUG_CTS1: IC3.16 USB_CHIP1.32
DEBUG_CTS2: IC9.16 USB_CHIP2.32
DEBUG_CTS3: IC13.16 USB_CHIP3.32
DEBUG_CTS4: IC17.16 USB_CHIP4.32
DEBUG_RTS: IC2.17 USB_CHIP.8
DEBUG_RTS1: IC3.17 USB_CHIP1.8
DEBUG_RTS2: IC9.17 USB_CHIP2.8
DEBUG_RTS3: IC13.17 USB_CHIP3.8
DEBUG_RTS4: IC17.17 USB_CHIP4.8
DEBUG_RX: IC2.18 USB_CHIP.30
DEBUG_RX1: IC3.18 USB_CHIP1.30
DEBUG_RX2: IC9.18 USB_CHIP2.30
DEBUG_RX3: IC13.18 USB_CHIP3.30
DEBUG_RX4: IC17.18 USB_CHIP4.30
DEBUG_TX: IC2.19 USB_CHIP.2
DEBUG_TX1: IC3.19 USB_CHIP1.2
DEBUG_TX2: IC9.19 USB_CHIP2.2
DEBUG_TX3: IC13.19 USB_CHIP3.2
DEBUG_TX4: IC17.19 USB_CHIP4.2
EKG: IC2.2 R13.2 R14.1
EKG1: IC3.2 R46.2 R47.1
EKG2: IC9.2 R81.2 R82.1
EKG3: IC13.2 R118.2 R119.1
EKG4: IC17.2 R153.2 R154.1
FG_AL: IC2.38 R12.2 U$2.5
FG_AL1: IC3.38 R60.2 U$9.5
FG_AL2: IC9.38 R95.2 U$15.5
FG_AL3: IC13.38 R132.2 U$21.5
FG_AL4: IC17.38 R167.2 U$27.5
FG_SCL: IC2.37 R16.2 U$2.3
FG_SCL1: IC3.37 R62.2 U$9.3
FG_SCL2: IC9.37 R97.2 U$15.3
FG_SCL3: IC13.37 R134.2 U$21.3
FG_SCL4: IC17.37 R169.2 U$27.3
FG_SDA: IC2.36 R15.2 U$2.4
FG_SDA1: IC3.36 R61.2 U$9.4
FG_SDA2: IC9.36 R96.2 U$15.4
FG_SDA3: IC13.36 R133.2 U$21.4
FG_SDA4: IC17.36 R168.2 U$27.4
GND: ACCEL.2 ACCEL.4 ACCEL.5 ACCEL.10 C1.2 C6.C C7.2 C8.2 C9.2 C10.2 C11.2 C13.2 C16.2 C17.2 C18.2 C20.2 C21.C C22.C C23.C C24.C C25.2 C26.2 C27.2 C28.2 C29.C C30.C C31.2 C32.2 C34.2 C36.2 C59.2 CHARGER/MCP7383.2 D1.1 D2.1 D3.1 HUMIDITY.-V IC2.14 IC2.24 IC2.34 IC2.44 IC2.52 IC2.60 IC2.63 IC2.64 IC4.2 IC5.2 IC25.4 ISP.6 LED1.C LED2.C LED3.C MAIN_OSC.2 R3.1 R5.2 R14.2 R26.1 R39.2 R101.1 SD.6 SD.CD2 SD.GND1 SD.GND3 U$1.3 U$2.2 U$3.3 U$4.2 U$6.5 USB_CHIP.4 USB_CHIP.17 USB_CHIP.20 USB_CHIP.24 USB_CHIP.26 VREG.2
GND1: ACCEL1.2 ACCEL1.4 ACCEL1.5 ACCEL1.10 C14.2 C35.2 C37.2 C39.2 C42.2 C43.2 C44.C C45.2 C46.2 C47.C C48.C C49.2 C50.2 C51.2 C52.2 C53.2 C54.2 C55.2 C56.C C57.2 C58.C C60.C C61.2 C62.C C63.2 C64.2 C65.2 CHARGER/MCP1.2 D4.1 D5.1 D6.1 HUMIDITY1.-V IC1.4 IC3.14 IC3.24 IC3.34 IC3.44 IC3.52 IC3.60 IC3.63 IC3.64 IC6.2 IC7.2 ISP1.6 LED4.C LED5.C LED6.C MAIN_OSC1.2 R43.1 R47.2 R54.1 R56.2 R57.2 R67.1 SD1.6 SD1.CD2 SD1.GND1 SD1.GND3 U$8.3 U$9.2 U$10.3 U$11.2 U$12.5 USB_CHIP1.4 USB_CHIP1.17 USB_CHIP1.20 USB_CHIP1.24 USB_CHIP1.26 VREG1.2
GND2: ACCEL2.2 ACCEL2.4 ACCEL2.5 ACCEL2.10 C67.2 C70.2 C71.2 C73.2 C76.2 C77.2 C78.C C79.2 C80.2 C81.C C82.C C83.2 C84.2 C85.2 C86.2 C87.2 C88.2 C89.2 C90.C C91.2 C92.C C93.C C94.2 C95.C C96.2 C97.2 C98.2 CHARGER/MCP2.2 D7.1 D8.1 D9.1 HUMIDITY2.-V IC8.4 IC9.14 IC9.24 IC9.34 IC9.44 IC9.52 IC9.60 IC9.63 IC9.64 IC10.2 IC11.2 ISP2.6 LED7.C LED8.C LED9.C MAIN_OSC2.2 R78.1 R82.2 R89.1 R91.2 R92.2 R104.1 SD2.6 SD2.CD2 SD2.GND1 SD2.GND3 U$14.3 U$15.2 U$16.3 U$17.2 U$18.5 USB_CHIP2.4 USB_CHIP2.17 USB_CHIP2.20 USB_CHIP2.24 USB_CHIP2.26 VREG2.2
GND3: ACCEL3.2 ACCEL3.4 ACCEL3.5 ACCEL3.10 C100.2 C103.2 C104.2 C106.2 C109.2 C110.2 C111.C C112.2 C113.2 C114.C C115.C C116.2 C117.2 C118.2 C119.2 C120.2 C121.2 C122.2 C123.C C124.2 C125.C C126.C C127.2 C128.C C129.2 C130.2 C131.2 CHARGER/MCP3.2 D10.1 D11.1 D12.1 HUMIDITY3.-V IC12.4 IC13.14 IC13.24 IC13.34 IC13.44 IC13.52 IC13.60 IC13.63 IC13.64 IC14.2 IC15.2 ISP3.6 LED10.C LED11.C LED12.C MAIN_OSC3.2 R115.1 R119.2 R126.1 R128.2 R129.2 R139.1 SD3.6 SD3.CD2 SD3.GND1 SD3.GND3 U$20.3 U$21.2 U$22.3 U$23.2 U$24.5 USB_CHIP3.4 USB_CHIP3.17 USB_CHIP3.20 USB_CHIP3.24 USB_CHIP3.26 VREG3.2
GND4: ACCEL4.2 ACCEL4.4 ACCEL4.5 ACCEL4.10 C133.2 C136.2 C137.2 C139.2 C142.2 C143.2 C144.C C145.2 C146.2 C147.C C148.C C149.2 C150.2 C151.2 C152.2 C153.2 C154.2 C155.2 C156.C C157.2 C158.C C159.C C160.2 C161.C C162.2 C163.2 C164.2 CHARGER/MCP4.2 D13.1 D14.1 D15.1 HUMIDITY4.-V IC16.4 IC17.14 IC17.24 IC17.34 IC17.44 IC17.52 IC17.60 IC17.63 IC17.64 IC18.2 IC19.2 ISP4.6 LED13.C LED14.C LED15.C MAIN_OSC4.2 R150.1 R154.2 R161.1 R163.2 R164.2 R174.1 SD4.6 SD4.CD2 SD4.GND1 SD4.GND3 U$26.3 U$27.2 U$28.3 U$29.2 U$30.5 USB_CHIP4.4 USB_CHIP4.17 USB_CHIP4.20 USB_CHIP4.24 USB_CHIP4.26 VREG4.2
GREEN: IC2.47 R20.2
GREEN1: IC3.47 R63.2
GREEN2: IC9.47 R98.2
GREEN3: IC13.47 R135.2
GREEN4: IC17.47 R170.2
HUMIDITY: IC2.4 R38.1 R39.1
HUMIDITY1: IC3.4 R55.1 R56.1
HUMIDITY2: IC9.4 R90.1 R91.1
HUMIDITY3: IC13.4 R127.1 R128.1
HUMIDITY4: IC17.4 R162.1 R163.1
LA: C4.2 IC25.2 R10.1
LA1: C19.2 IC1.2 R34.1
LA2: C69.2 IC8.2 R71.1
LA3: C102.2 IC12.2 R108.1
LA4: C135.2 IC16.2 R143.1
LA_IN: D3.3 L.1 L.2 R29.1
LA_IN1: D6.3 L1.1 L1.2 R51.1
LA_IN2: D9.3 L2.1 L2.2 R86.1
LA_IN3: D12.3 L3.1 L3.2 R123.1
LA_IN4: D15.3 L4.1 L4.2 R158.1
N$1: C25.1 R13.1 R24.2
N$2: IC25.6 R24.1
N$3: C34.1 VREG.4
N$4: C9.1 IC2.42 RTC_OSC.P$2
N$5: LED3.A R21.1
N$6: IC2.57 ISP.5 R17.1
N$7: IC2.56 ISP.1
N$8: C8.1 IC2.43 RTC_OSC.P$1
N$9: IC2.59 MAIN_OSC.3
N$10: LED1.A R20.1
N$11: C7.1 C12.2 IC2.62 R25.1 R26.2
N$12: IC1.1 R37.1
N$13: IC1.8 R40.1
N$14: C3.1 C13.1 R8.2 R19.2
N$15: U$2.6 U$4.1
N$16: CHARGER/MCP7383.5 R5.1
N$17: R28.1 R33.1 R34.2 R35.2
N$18: IC25.1 R31.1
N$19: IC6.1 IC6.4 R41.2
N$20: IC3.57 ISP1.5 R45.1
N$21: IC3.56 ISP1.1
N$22: IC3.59 MAIN_OSC1.3
N$23: LED2.A R23.1
N$24: C46.1 IC3.42 RTC_OSC1.P$2
N$25: C45.1 IC3.43 RTC_OSC1.P$1
N$26: R7.1 R8.1 R10.2 R11.2
N$27: LED4.A R49.1
N$28: IC4.1 IC4.4 R1.2
N$29: C19.1 C50.1 R28.2 R51.2
N$30: C38.1 IC1.5 R36.1
N$31: C40.1 IC7.4 R41.1 R42.1
N$32: C4.1 C17.1 R7.2 R29.2
N$33: IC1.6 R27.1
N$34: C14.1 R27.2 R46.1
N$35: HUMIDITY1.OUT R55.2
N$36: IC25.8 R32.1
N$37: C33.1 IC25.5 R18.1
N$38: C2.1 IC5.4 R1.1 R4.1
N$39: CHARGER/MCP1.5 R57.1
N$40: C15.1 C49.1 R33.2 R50.2
N$41: C63.1 VREG1.4
N$42: LED6.A R64.1
N$43: LED5.A R63.1
N$44: C65.1 C66.2 IC3.62 R66.1 R67.2
N$45: U$9.6 U$11.1
N$46: IC8.1 R74.1
N$47: IC8.8 R75.1
N$48: R69.1 R70.1 R71.2 R72.2
N$49: IC10.1 IC10.4 R76.2
N$50: IC9.57 ISP2.5 R80.1
N$51: IC9.56 ISP2.1
N$52: IC9.59 MAIN_OSC2.3
N$53: C80.1 IC9.42 RTC_OSC2.P$2
N$54: C79.1 IC9.43 RTC_OSC2.P$1
N$55: LED7.A R84.1
N$56: C69.1 C84.1 R69.2 R86.2
N$57: C72.1 IC8.5 R73.1
N$58: HUMIDITY.OUT R38.2
N$59: C74.1 IC11.4 R76.1 R77.1
N$60: IC8.6 R68.1
N$61: C67.1 R68.2 R81.1
N$62: HUMIDITY2.OUT R90.2
N$63: CHARGER/MCP2.5 R92.1
N$64: C68.1 C83.1 R70.2 R85.2
N$65: C96.1 VREG2.4
N$66: LED9.A R99.1
N$67: LED8.A R98.1
N$68: C98.1 C99.2 IC9.62 R103.1 R104.2
N$69: U$15.6 U$17.1
N$70: IC12.1 R111.1
N$71: IC12.8 R112.1
N$72: R106.1 R107.1 R108.2 R109.2
N$73: IC14.1 IC14.4 R113.2
N$74: IC13.57 ISP3.5 R117.1
N$75: IC13.56 ISP3.1
N$76: IC13.59 MAIN_OSC3.3
N$77: C113.1 IC13.42 RTC_OSC3.P$2
N$78: C112.1 IC13.43 RTC_OSC3.P$1
N$79: LED10.A R121.1
N$80: C102.1 C117.1 R106.2 R123.2
N$81: C105.1 IC12.5 R110.1
N$82: C107.1 IC15.4 R113.1 R114.1
N$83: IC12.6 R105.1
N$84: C100.1 R105.2 R118.1
N$85: HUMIDITY3.OUT R127.2
N$86: CHARGER/MCP3.5 R129.1
N$87: C101.1 C116.1 R107.2 R122.2
N$88: C129.1 VREG3.4
N$89: LED12.A R136.1
N$90: LED11.A R135.1
N$91: C131.1 C132.2 IC13.62 R138.1 R139.2
N$92: U$21.6 U$23.1
N$93: IC16.1 R146.1
N$94: IC16.8 R147.1
N$95: R141.1 R142.1 R143.2 R144.2
N$96: IC18.1 IC18.4 R148.2
N$97: IC17.57 ISP4.5 R152.1
N$98: IC17.56 ISP4.1
N$99: IC17.59 MAIN_OSC4.3
N$100: C146.1 IC17.42 RTC_OSC4.P$2
N$101: C145.1 IC17.43 RTC_OSC4.P$1
N$102: LED13.A R156.1
N$103: C135.1 C150.1 R141.2 R158.2
N$104: C138.1 IC16.5 R145.1
N$105: C140.1 IC19.4 R148.1 R149.1
N$106: IC16.6 R140.1
N$107: C133.1 R140.2 R153.1
N$108: HUMIDITY4.OUT R162.2
N$109: CHARGER/MCP4.5 R164.1
N$110: C134.1 C149.1 R142.2 R157.2
N$111: C162.1 VREG4.4
N$112: LED15.A R171.1
N$113: LED14.A R170.1
N$114: C164.1 C165.2 IC17.62 R173.1 R174.2
N$115: U$27.6 U$29.1
RA: C3.2 IC25.3 R11.1
RA1: C15.2 IC1.3 R35.1
RA2: C68.2 IC8.3 R72.1
RA3: C101.2 IC12.3 R109.1
RA4: C134.2 IC16.3 R144.1
RA_IN: D2.3 R19.1 R.1 R.2
RA_IN1: D5.3 R48.1 R48.2 R50.1
RA_IN2: D8.3 R83.1 R83.2 R85.1
RA_IN3: D11.3 R120.1 R120.2 R122.1
RA_IN4: D14.3 R155.1 R155.2 R157.1
RED: IC2.46 R21.2
RED1: IC3.46 R64.2
RED2: IC9.46 R99.2
RED3: IC13.46 R136.2
RED4: IC17.46 R171.2
RESP+: IC2.7 R2.1 U$1.4
RESP+1: IC3.7 R53.1 U$8.4
RESP+2: IC9.7 R88.1 U$14.4
RESP+3: IC13.7 R125.1 U$20.4
RESP+4: IC17.7 R160.1 U$26.4
RESP-: IC2.10 R3.2 U$1.5
RESP-1: IC3.10 R54.2 U$8.5
RESP-2: IC9.10 R89.2 U$14.5
RESP-3: IC13.10 R126.2 U$20.5
RESP-4: IC17.10 R161.2 U$26.5
RESP_DRIVER: IC2.8 R2.2
RESP_DRIVER1: IC3.8 R53.2
RESP_DRIVER2: IC9.8 R88.2
RESP_DRIVER3: IC13.8 R125.2
RESP_DRIVER4: IC17.8 R160.2
RLD: C2.2 C18.1 IC5.1 R4.2 R30.1
RLD1: C40.2 C51.1 IC7.1 R42.2 R52.1
RLD2: C74.2 C85.1 IC11.1 R77.2 R87.1
RLD3: C107.2 C118.1 IC15.1 R114.2 R124.1
RLD4: C140.2 C151.1 IC19.1 R149.2 R159.1
RLD_OUT: D1.3 R30.2 RLD.1 RLD.2
RLD_OUT1: D4.3 R52.2 RLD1.1 RLD1.2
RLD_OUT2: D7.3 R87.2 RLD2.1 RLD2.2
RLD_OUT3: D10.3 R124.2 RLD3.1 RLD3.2
RLD_OUT4: D13.3 R159.2 RLD4.1 RLD4.2
SD_CD: IC2.50 R6.2 SD.CD1
SD_CD1: IC3.50 R58.2 SD1.CD1
SD_CD2: IC9.50 R93.2 SD2.CD1
SD_CD3: IC13.50 R130.2 SD3.CD1
SD_CD4: IC17.50 R165.2 SD4.CD1
SD_CLK: IC2.33 SD.5
SD_CLK1: IC3.33 SD1.5
SD_CLK2: IC9.33 SD2.5
SD_CLK3: IC13.33 SD3.5
SD_CLK4: IC17.33 SD4.5
SD_CS: IC2.30 SD.2
SD_CS1: IC3.30 SD1.2
SD_CS2: IC9.30 SD2.2
SD_CS3: IC13.30 SD3.2
SD_CS4: IC17.30 SD4.2
SD_MISO: IC2.32 SD.7
SD_MISO1: IC3.32 SD1.7
SD_MISO2: IC9.32 SD2.7
SD_MISO3: IC13.32 SD3.7
SD_MISO4: IC17.32 SD4.7
SD_MOSI: IC2.31 SD.3
SD_MOSI1: IC3.31 SD1.3
SD_MOSI2: IC9.31 SD2.3
SD_MOSI3: IC13.31 SD3.3
SD_MOSI4: IC17.31 SD4.3
TEMP: IC2.3 R9.1 U$1.2
TEMP1: IC3.3 R59.1 U$8.2
TEMP2: IC9.3 R94.1 U$14.2
TEMP3: IC13.3 R131.1 U$20.2
TEMP4: IC17.3 R166.1 U$26.2
USB_POWER: C31.1 USB_CHIP.1 USB_CHIP.16
USB_POWER1: C61.1 USB_CHIP1.1 USB_CHIP1.16
USB_POWER2: C94.1 USB_CHIP2.1 USB_CHIP2.16
USB_POWER3: C127.1 USB_CHIP3.1 USB_CHIP3.16
USB_POWER4: C160.1 USB_CHIP4.1 USB_CHIP4.16
V_CENTRAL: IC4.3 R31.2 R32.2
V_CENTRAL1: IC6.3 R37.2 R40.2
V_CENTRAL2: IC10.3 R74.2 R75.2
V_CENTRAL3: IC14.3 R111.2 R112.2
V_CENTRAL4: IC18.3 R146.2 R147.2
V_USB: C27.1 C30.A CHARGER/MCP7383.4 U$6.1 USB_CHIP.19
V_USB1: C57.1 C60.A CHARGER/MCP1.4 U$12.1 USB_CHIP1.19
V_USB2: C91.1 C93.A CHARGER/MCP2.4 U$18.1 USB_CHIP2.19
V_USB3: C124.1 C126.A CHARGER/MCP3.4 U$24.1 USB_CHIP3.19
V_USB4: C157.1 C159.A CHARGER/MCP4.4 U$30.1 USB_CHIP4.19
VBATT: C21.A C24.A CHARGER/MCP7383.3 U$2.1 VREG.1 VREG.3
VBATT1: C47.A C58.A CHARGER/MCP1.3 U$9.1 VREG1.1 VREG1.3
VBATT2: C81.A C92.A CHARGER/MCP2.3 U$15.1 VREG2.1 VREG2.3
VBATT3: C114.A C125.A CHARGER/MCP3.3 U$21.1 VREG3.1 VREG3.3
VBATT4: C147.A C158.A CHARGER/MCP4.3 U$27.1 VREG4.1 VREG4.3
VCC: ACCEL.1 ACCEL.6 C1.1 C5.1 C6.A C11.1 C12.1 C16.1 C20.1 C22.A C23.A C26.1 C28.1 C29.A C32.1 C36.1 C59.1 D1.2 D2.2 D3.2 HUMIDITY.V+ IC2.6 IC2.15 IC2.25 IC2.35 IC2.45 IC2.53 IC2.61 IC4.5 IC5.5 IC25.7 ISP.2 MAIN_OSC.4 R6.1 R9.2 R12.1 R15.1 R16.1 R17.2 R22.2 R23.2 R25.2 R100.2 SD.4 U$1.1 U$5.3
VCC1: ACCEL1.1 ACCEL1.6 C37.1 C39.1 C41.1 C42.1 C43.1 C44.A C48.A C52.1 C53.1 C54.1 C55.1 C56.A C62.A C64.1 C66.1 D4.2 D5.2 D6.2 HUMIDITY1.V+ IC1.7 IC3.6 IC3.15 IC3.25 IC3.35 IC3.45 IC3.53 IC3.61 IC6.5 IC7.5 ISP1.2 MAIN_OSC1.4 R44.2 R45.2 R49.2 R58.1 R59.2 R60.1 R61.1 R62.1 R65.2 R66.2 SD1.4 U$7.3 U$8.1
VCC2: ACCEL2.1 ACCEL2.6 C71.1 C73.1 C75.1 C76.1 C77.1 C78.A C82.A C86.1 C87.1 C88.1 C89.1 C90.A C95.A C97.1 C99.1 D7.2 D8.2 D9.2 HUMIDITY2.V+ IC8.7 IC9.6 IC9.15 IC9.25 IC9.35 IC9.45 IC9.53 IC9.61 IC10.5 IC11.5 ISP2.2 MAIN_OSC2.4 R79.2 R80.2 R84.2 R93.1 R94.2 R95.1 R96.1 R97.1 R102.2 R103.2 SD2.4 U$13.3 U$14.1
VCC3: ACCEL3.1 ACCEL3.6 C104.1 C106.1 C108.1 C109.1 C110.1 C111.A C115.A C119.1 C120.1 C121.1 C122.1 C123.A C128.A C130.1 C132.1 D10.2 D11.2 D12.2 HUMIDITY3.V+ IC12.7 IC13.6 IC13.15 IC13.25 IC13.35 IC13.45 IC13.53 IC13.61 IC14.5 IC15.5 ISP3.2 MAIN_OSC3.4 R116.2 R117.2 R121.2 R130.1 R131.2 R132.1 R133.1 R134.1 R137.2 R138.2 SD3.4 U$19.3 U$20.1
VCC4: ACCEL4.1 ACCEL4.6 C137.1 C139.1 C141.1 C142.1 C143.1 C144.A C148.A C152.1 C153.1 C154.1 C155.1 C156.A C161.A C163.1 C165.1 D13.2 D14.2 D15.2 HUMIDITY4.V+ IC16.7 IC17.6 IC17.15 IC17.25 IC17.35 IC17.45 IC17.53 IC17.61 IC18.5 IC19.5 ISP4.2 MAIN_OSC4.4 R151.2 R152.2 R156.2 R165.1 R166.2 R167.1 R168.1 R169.1 R172.2 R173.2 SD4.4 U$25.3 U$26.1
VDD: IC2.51 U$5.2 VREG.5
VDD1: IC3.51 U$7.2 VREG1.5
VDD2: IC9.51 U$13.2 VREG2.5
VDD3: IC13.51 U$19.2 VREG3.5
VDD4: IC17.51 U$25.2 VREG4.5
VREF: C5.2 C10.1 C33.2 IC5.3 R18.2 R100.1 R101.2
VREF1: C35.1 C38.2 C41.2 IC7.3 R36.2 R43.2 R44.1
VREF2: C70.1 C72.2 C75.2 IC11.3 R73.2 R78.2 R79.1
VREF3: C103.1 C105.2 C108.2 IC15.3 R110.2 R115.2 R116.1
VREF4: C136.1 C138.2 C141.2 IC19.3 R145.2 R150.2 R151.1

## Tracks (layer width: path | path; a pad name or v marks a point on that pad's centre or on a via)
ACC_CLK  (via drill 0.5)
  Top 0.254: IC2.23 47.64,7.2 v47.73,6.6 | v43.61,4.85 43.61,4.62 44.07,3.63 44.99,3.63 ACCEL.14
  Bottom 0.254: v47.73,6.6 44.07,6.55 44.07,5.23 v43.61,4.85
ACC_CLK1  (via drill 0.5)
  Top 0.254: IC3.23 47.64,35.14 v47.73,34.54 | v43.61,32.79 43.61,32.56 44.07,31.57 44.99,31.57 ACCEL1.14
  Bottom 0.254: v47.73,34.54 44.07,34.49 44.07,33.17 v43.61,32.79
ACC_CLK2  (via drill 0.5)
  Top 0.254: IC9.23 47.64,63.08 v47.73,62.48 | v43.61,60.73 43.61,60.5 44.07,59.51 44.99,59.51 ACCEL2.14
  Bottom 0.254: v47.73,62.48 44.07,62.43 44.07,61.11 v43.61,60.73
ACC_CLK3  (via drill 0.5)
  Top 0.254: IC13.23 47.64,91.02 v47.73,90.42 | v43.61,88.67 43.61,88.44 44.07,87.45 44.99,87.45 ACCEL3.14
  Bottom 0.254: v47.73,90.42 44.07,90.37 44.07,89.05 v43.61,88.67
ACC_CLK4  (via drill 0.5)
  Top 0.254: IC17.23 47.64,118.96 v47.73,118.36 | v43.61,116.61 43.61,116.38 44.07,115.39 44.99,115.39 ACCEL4.14
  Bottom 0.254: v47.73,118.36 44.07,118.31 44.07,116.99 v43.61,116.61
ACC_CS  (via drill 0.5)
  Top 0.254: IC2.20 46.14,7.38 44.88,5.94 43.46,5.94 41.58,4.47 41.58,3.76 41.22,3.4 40.26,3.2 v39.75,2.69 | ACCEL.7 49.84,3.61 50.04,3.4 50.06,2.39 v50.19,2.26
  Bottom 0.254: 49.86,2.56 50.16,2.26 v50.19,2.26 49.55,2.87 39.95,2.87 v39.75,2.69
ACC_CS1  (via drill 0.5)
  Top 0.254: IC3.20 46.14,35.32 44.88,33.88 43.46,33.88 41.58,32.41 41.58,31.7 41.22,31.34 40.26,31.14 v39.75,30.63 | ACCEL1.7 49.84,31.55 50.04,31.34 50.06,30.33 v50.19,30.2
  Bottom 0.254: 49.86,30.5 50.16,30.2 v50.19,30.2 49.55,30.81 39.95,30.81 v39.75,30.63
ACC_CS2  (via drill 0.5)
  Top 0.254: IC9.20 46.14,63.26 44.88,61.82 43.46,61.82 41.58,60.35 41.58,59.64 41.22,59.28 40.26,59.08 v39.75,58.57 | ACCEL2.7 49.84,59.49 50.04,59.28 50.06,58.27 v50.19,58.14
  Bottom 0.254: 49.86,58.45 50.16,58.14 v50.19,58.14 49.55,58.75 39.95,58.75 v39.75,58.57
ACC_CS3  (via drill 0.5)
  Top 0.254: IC13.20 46.14,91.2 44.88,89.76 43.46,89.76 41.58,88.29 41.58,87.58 41.22,87.22 40.26,87.02 v39.75,86.51 | ACCEL3.7 49.84,87.43 50.04,87.22 50.06,86.21 v50.19,86.08
  Bottom 0.254: 49.86,86.39 50.16,86.08 v50.19,86.08 49.55,86.69 39.95,86.69 v39.75,86.51
ACC_CS4  (via drill 0.5)
  Top 0.254: IC17.20 46.14,119.14 44.88,117.7 43.46,117.7 41.58,116.23 41.58,115.52 41.22,115.16 40.26,114.96 v39.75,114.45 | ACCEL4.7 49.84,115.37 50.04,115.16 50.06,114.15 v50.19,114.02
  Bottom 0.254: 49.86,114.33 50.16,114.02 v50.19,114.02 49.55,114.63 39.95,114.63 v39.75,114.45
ACC_INT1  (via drill 0.5)
  Top 0.254: IC2.48 52.71,16.49 53.98,17.75 55.07,17.75 v54.99,17.45 | v51.03,3.99 50.27,4.04 ACCEL.8
  Bottom 0.254: v54.99,17.45 55.19,18.14 54.86,18.47 54.53,18.47 53.03,19.94 51.84,19.94 50.93,18.52 50.95,17.88 51.21,17.63 51.21,4.17 v51.03,3.99
ACC_INT2  (via drill 0.5)
  Top 0.254: ACCEL.9 48.32,5.32 48.56,5.56 49.73,5.56 v50.22,5 | IC2.49 52.14,16.88 53.59,18.34 55.96,18.34 v56.16,18.09
  Bottom 0.254: v50.22,5 50.75,5.54 50.75,17.2 50.34,17.6 50.32,18.52 50.9,19.68 51.54,20.52 53.31,20.52 54.13,19.61 54.63,19.1 55.5,19.1 56.06,18.54 v56.16,18.09
ACC_INT3  (via drill 0.5)
  Top 0.254: IC3.48 52.71,44.43 53.98,45.7 55.07,45.7 v54.99,45.39 | v51.03,31.93 50.27,31.98 ACCEL1.8
  Bottom 0.254: v54.99,45.39 55.19,46.08 54.86,46.41 54.53,46.41 53.03,47.88 51.84,47.88 50.93,46.46 50.95,45.82 51.21,45.57 51.21,32.11 v51.03,31.93
ACC_INT4  (via drill 0.5)
  Top 0.254: ACCEL1.9 48.32,33.26 48.56,33.5 49.73,33.5 v50.22,32.94 | IC3.49 52.14,44.82 53.59,46.28 55.96,46.28 v56.16,46.02
  Bottom 0.254: v50.22,32.94 50.75,33.48 50.75,45.14 50.34,45.54 50.32,46.46 50.9,47.62 51.54,48.46 53.31,48.46 54.13,47.55 54.63,47.04 55.5,47.04 56.06,46.48 v56.16,46.02
ACC_INT5  (via drill 0.5)
  Top 0.254: IC9.48 52.71,72.37 53.98,73.64 55.07,73.64 v54.99,73.33 | v51.03,59.87 50.27,59.92 ACCEL2.8
  Bottom 0.254: v54.99,73.33 55.19,74.02 54.86,74.35 54.53,74.35 53.03,75.82 51.84,75.82 50.93,74.4 50.95,73.76 51.21,73.51 51.21,60.05 v51.03,59.87
ACC_INT6  (via drill 0.5)
  Top 0.254: ACCEL2.9 48.32,61.2 48.56,61.44 49.73,61.44 v50.22,60.88 | IC9.49 52.14,72.76 53.59,74.22 55.96,74.22 v56.16,73.97
  Bottom 0.254: v50.22,60.88 50.75,61.42 50.75,73.08 50.34,73.48 50.32,74.4 50.9,75.56 51.54,76.4 53.31,76.4 54.13,75.49 54.63,74.98 55.5,74.98 56.06,74.42 v56.16,73.97
ACC_INT7  (via drill 0.5)
  Top 0.254: IC13.48 52.71,100.31 53.98,101.58 55.07,101.58 v54.99,101.27 | v51.03,87.81 50.27,87.86 ACCEL3.8
  Bottom 0.254: v54.99,101.27 55.19,101.96 54.86,102.29 54.53,102.29 53.03,103.76 51.84,103.76 50.93,102.34 50.95,101.7 51.21,101.45 51.21,87.99 v51.03,87.81
ACC_INT8  (via drill 0.5)
  Top 0.254: ACCEL3.9 48.32,89.14 48.56,89.38 49.73,89.38 v50.22,88.82 | IC13.49 52.14,100.7 53.59,102.16 55.96,102.16 v56.16,101.91
  Bottom 0.254: v50.22,88.82 50.75,89.36 50.75,101.02 50.34,101.42 50.32,102.34 50.9,103.5 51.54,104.34 53.31,104.34 54.13,103.43 54.63,102.92 55.5,102.92 56.06,102.36 v56.16,101.91
ACC_INT9  (via drill 0.5)
  Top 0.254: IC17.48 52.71,128.25 53.98,129.51 55.07,129.51 v54.99,129.21 | v51.03,115.75 50.27,115.8 ACCEL4.8
  Bottom 0.254: v54.99,129.21 55.19,129.9 54.86,130.23 54.53,130.23 53.03,131.7 51.84,131.7 50.93,130.28 50.95,129.64 51.21,129.39 51.21,115.93 v51.03,115.75
ACC_INT10  (via drill 0.5)
  Top 0.254: ACCEL4.9 48.32,117.08 48.56,117.32 49.73,117.32 v50.22,116.76 | IC17.49 52.14,128.64 53.59,130.1 55.96,130.1 v56.16,129.84
  Bottom 0.254: v50.22,116.76 50.75,117.3 50.75,128.96 50.34,129.36 50.32,130.28 50.9,131.44 51.54,132.28 53.31,132.28 54.13,131.37 54.63,130.86 55.5,130.86 56.06,130.3 v56.16,129.84
ACC_MISO
  Top 0.254: IC2.22 47.14,7.13 45.92,5.46 ACCEL.12
ACC_MISO1
  Top 0.254: IC3.22 47.14,35.07 45.92,33.4 ACCEL1.12
ACC_MISO2
  Top 0.254: IC9.22 47.14,63.01 45.92,61.34 ACCEL2.12
ACC_MISO3
  Top 0.254: IC13.22 47.14,90.95 45.92,89.28 ACCEL3.12
ACC_MISO4
  Top 0.254: IC17.22 47.14,118.89 45.92,117.22 ACCEL4.12
ACC_MOSI
  Top 0.254: ACCEL.13 45.12,5.32 46.64,7.27 IC2.21
ACC_MOSI1
  Top 0.254: ACCEL1.13 45.12,33.26 46.64,35.21 IC3.21
ACC_MOSI2
  Top 0.254: ACCEL2.13 45.12,61.2 46.64,63.15 IC9.21
ACC_MOSI3
  Top 0.254: ACCEL3.13 45.12,89.14 46.64,91.09 IC13.21
ACC_MOSI4
  Top 0.254: ACCEL4.13 45.12,117.08 46.64,119.03 IC17.21
BUTTON  (via drill 0.5)
  Top 0.254: U$3.1 33.83,5.63 R22.1 35.31,6.88 36.55,7.54 36.58,7.54 v36.55,7.59 | IC2.54 49.64,16.86 49.63,16.87 49.63,17.86 49.38,18.24 v49.4,19.89
  Bottom 0.254: v49.4,19.89 48.9,18.82 48.92,10.92 45.74,7.82 41.1,7.82 40.84,7.49 v36.55,7.59
BUTTON1  (via drill 0.5)
  Top 0.254: U$10.1 33.83,33.57 R65.1 35.31,34.82 36.55,35.48 36.58,35.48 v36.55,35.53 | IC3.54 49.64,44.8 49.63,44.81 49.63,45.8 49.38,46.18 v49.4,47.83
  Bottom 0.254: v49.4,47.83 48.9,46.76 48.92,38.86 45.74,35.76 41.1,35.76 40.84,35.43 v36.55,35.53
BUTTON2  (via drill 0.5)
  Top 0.254: U$16.1 33.83,61.51 R102.1 35.31,62.76 36.55,63.42 36.58,63.42 v36.55,63.48 | IC9.54 49.64,72.74 49.63,72.75 49.63,73.74 49.38,74.12 v49.4,75.77
  Bottom 0.254: v49.4,75.77 48.9,74.7 48.92,66.8 45.74,63.7 41.1,63.7 40.84,63.37 v36.55,63.48
BUTTON3  (via drill 0.5)
  Top 0.254: U$22.1 33.83,89.45 R137.1 35.31,90.7 36.55,91.36 36.58,91.36 v36.55,91.42 | IC13.54 49.64,100.68 49.63,100.69 49.63,101.68 49.38,102.06 v49.4,103.71
  Bottom 0.254: v49.4,103.71 48.9,102.64 48.92,94.74 45.74,91.64 41.1,91.64 40.84,91.31 v36.55,91.42
BUTTON4  (via drill 0.5)
  Top 0.254: U$28.1 33.83,117.39 R172.1 35.31,118.64 36.55,119.3 36.58,119.3 v36.55,119.36 | IC17.54 49.64,128.62 49.63,128.63 49.63,129.62 49.38,130 v49.4,131.65
  Bottom 0.254: v49.4,131.65 48.9,130.58 48.92,122.68 45.74,119.58 41.1,119.58 40.84,119.25 v36.55,119.36
CHARGE
  Top 0.254: IC2.29 50.64,6.36 52.4,4.6 52.4,1.7 52.91,1.19 60.35,1.19 60.55,1.4 60.55,3.33 60.33,3.56 59.79,3.56 CHARGER/MCP7383.1
CHARGE1
  Top 0.254: IC3.29 50.64,34.3 52.4,32.54 52.4,29.64 52.91,29.13 60.35,29.13 60.55,29.34 60.55,31.27 60.33,31.5 59.79,31.5 CHARGER/MCP1.1
CHARGE2
  Top 0.254: IC9.29 50.64,62.24 52.4,60.48 52.4,57.58 52.91,57.07 60.35,57.07 60.55,57.28 60.55,59.21 60.33,59.44 59.79,59.44 CHARGER/MCP2.1
CHARGE3
  Top 0.254: IC13.29 50.64,90.18 52.4,88.42 52.4,85.52 52.91,85.01 60.35,85.01 60.55,85.22 60.55,87.15 60.33,87.38 59.79,87.38 CHARGER/MCP3.1
CHARGE4
  Top 0.254: IC17.29 50.64,118.12 52.4,116.36 52.4,113.46 52.91,112.95 60.35,112.95 60.55,113.16 60.55,115.09 60.33,115.32 59.79,115.32 CHARGER/MCP4.1
D+  (via drill 0.5)
  Top 0.254: USB_CHIP.14 23.74,11.93 23.5,11.68 20.02,11.71 v19.51,11.2
  Bottom 0.254: 19.18,11.2 v19.51,11.2 19.05,10.74 U$6.3
D+1  (via drill 0.5)
  Top 0.254: USB_CHIP1.14 23.74,39.87 23.5,39.62 20.02,39.65 v19.51,39.14
  Bottom 0.254: 19.18,39.14 v19.51,39.14 19.05,38.68 U$12.3
D+2  (via drill 0.5)
  Top 0.254: USB_CHIP2.14 23.74,67.81 23.5,67.56 20.02,67.59 v19.51,67.08
  Bottom 0.254: 19.18,67.08 v19.51,67.08 19.05,66.62 U$18.3
D+3  (via drill 0.5)
  Top 0.254: USB_CHIP3.14 23.74,95.75 23.5,95.5 20.02,95.53 v19.51,95.02
  Bottom 0.254: 19.18,95.02 v19.51,95.02 19.05,94.56 U$24.3
D+4  (via drill 0.5)
  Top 0.254: USB_CHIP4.14 23.74,123.69 23.5,123.44 20.02,123.47 v19.51,122.96
  Bottom 0.254: 19.18,122.96 v19.51,122.96 19.05,122.5 U$30.3
D-  (via drill 0.5)
  Top 0.254: USB_CHIP.15 24.24,11.41 23.88,11.18 v20.75,10.87
  Bottom 0.254: U$6.2 19.7,9.82 v20.75,10.87
D-1  (via drill 0.5)
  Top 0.254: USB_CHIP1.15 24.24,39.35 23.88,39.12 v20.75,38.81
  Bottom 0.254: U$12.2 19.7,37.76 v20.75,38.81
D-2  (via drill 0.5)
  Top 0.254: USB_CHIP2.15 24.24,67.29 23.88,67.06 v20.75,66.75
  Bottom 0.254: U$18.2 19.7,65.7 v20.75,66.75
D-3  (via drill 0.5)
  Top 0.254: USB_CHIP3.15 24.24,95.23 23.88,95 v20.75,94.69
  Bottom 0.254: U$24.2 19.7,93.64 v20.75,94.69
D-4  (via drill 0.5)
  Top 0.254: USB_CHIP4.15 24.24,123.17 23.88,122.94 v20.75,122.63
  Bottom 0.254: U$30.2 19.7,121.58 v20.75,122.63
DEBUG_CTS  (via drill 0.5)
  Top 0.254: USB_CHIP.32 20.76,16.91 v19.89,17.78 | v40.41,5.82 40.28,5.84 40.28,7.85 40.69,8.26 43.89,8.26 44.06,8.43 IC2.16
  Bottom 0.254: v19.89,17.78 22.07,15.6 28.55,15.6 29.87,14.28 29.92,12.83 36.09,5.94 40.01,5.97 40.21,5.77 v40.41,5.82
DEBUG_CTS1  (via drill 0.5)
  Top 0.254: USB_CHIP1.32 20.76,44.84 v19.89,45.72 | v40.41,33.76 40.28,33.78 40.28,35.79 40.69,36.2 43.89,36.2 44.06,36.37 IC3.16
  Bottom 0.254: v19.89,45.72 22.07,43.54 28.55,43.54 29.87,42.22 29.92,40.77 36.09,33.88 40.01,33.91 40.21,33.71 v40.41,33.76
DEBUG_CTS2  (via drill 0.5)
  Top 0.254: USB_CHIP2.32 20.76,72.78 v19.89,73.66 | v40.41,61.7 40.28,61.72 40.28,63.73 40.69,64.14 43.89,64.14 44.06,64.31 IC9.16
  Bottom 0.254: v19.89,73.66 22.07,71.48 28.55,71.48 29.87,70.16 29.92,68.71 36.09,61.82 40.01,61.85 40.21,61.65 v40.41,61.7
DEBUG_CTS3  (via drill 0.5)
  Top 0.254: USB_CHIP3.32 20.76,100.72 v19.89,101.6 | v40.41,89.64 40.28,89.66 40.28,91.67 40.69,92.08 43.89,92.08 44.06,92.25 IC13.16